# Altium PCB bottom_test_pcb.pcbdoc
Units mm, origin at the board's own origin, x right, y up, seen from the top; angles counter-clockwise.
Board outline 99.79 x 89.91 mm, 2 copper layers (Top Layer, Bottom Layer), stack 1.671 mm thick; 74 components, 41 nets, 281 pads, 5 vias.
Unrouted connection lines stored in the file: 2.
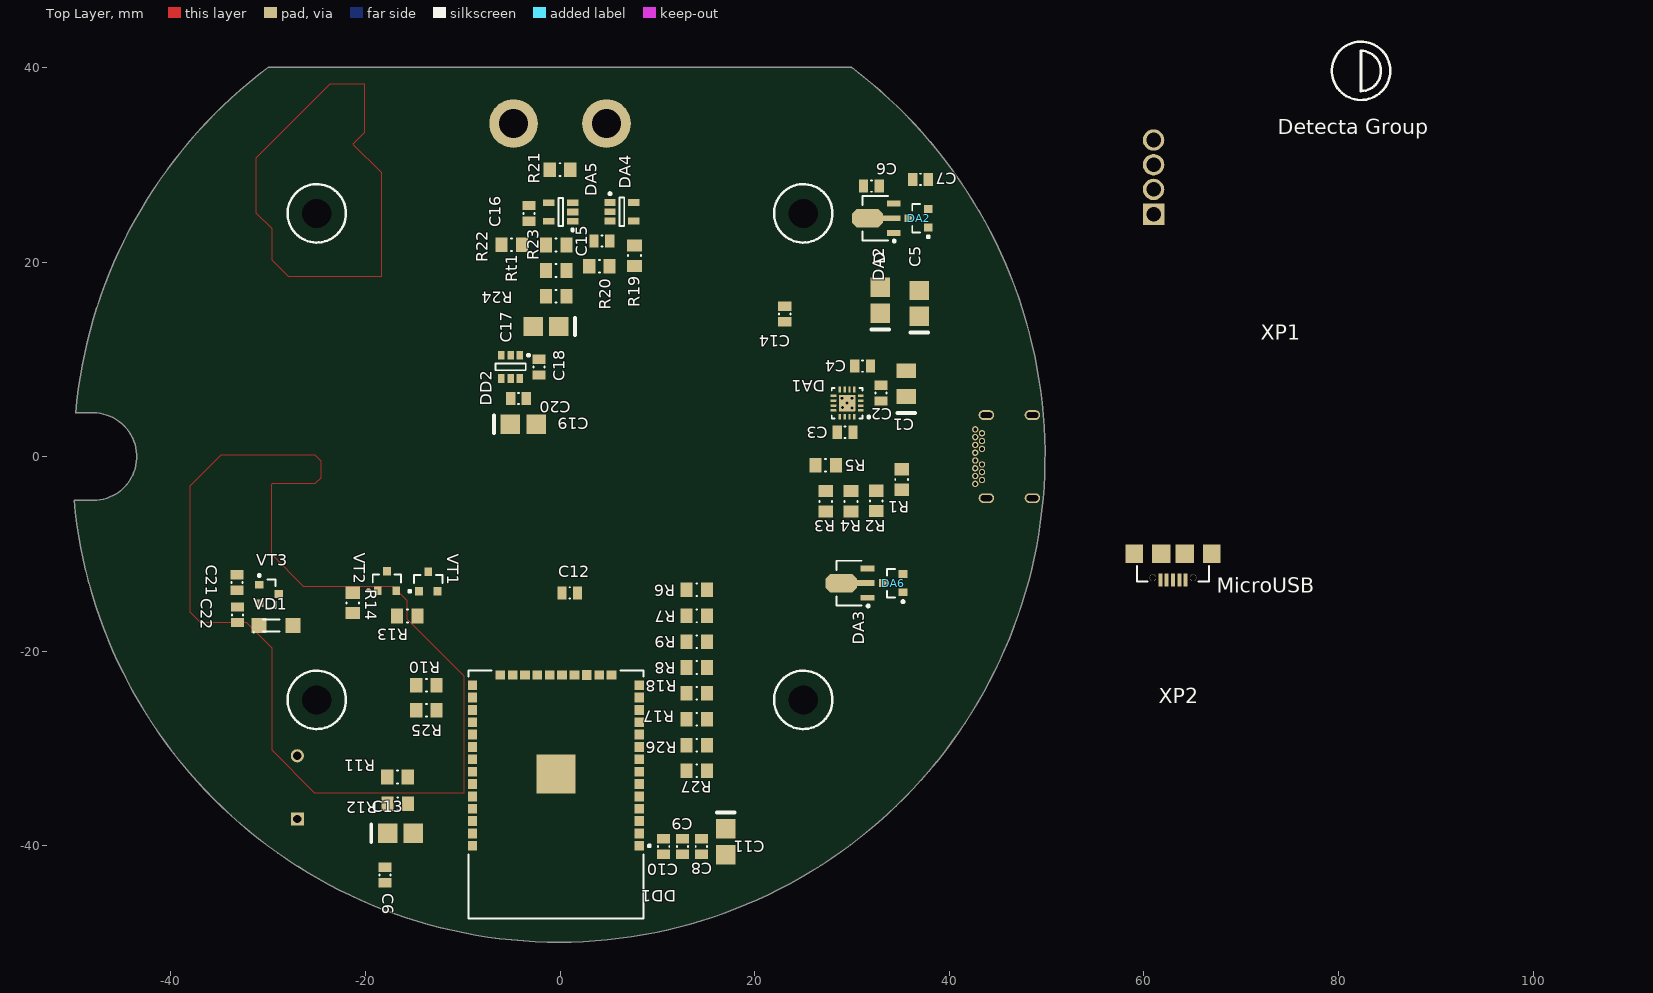
[diagram p0: Top Layer view]
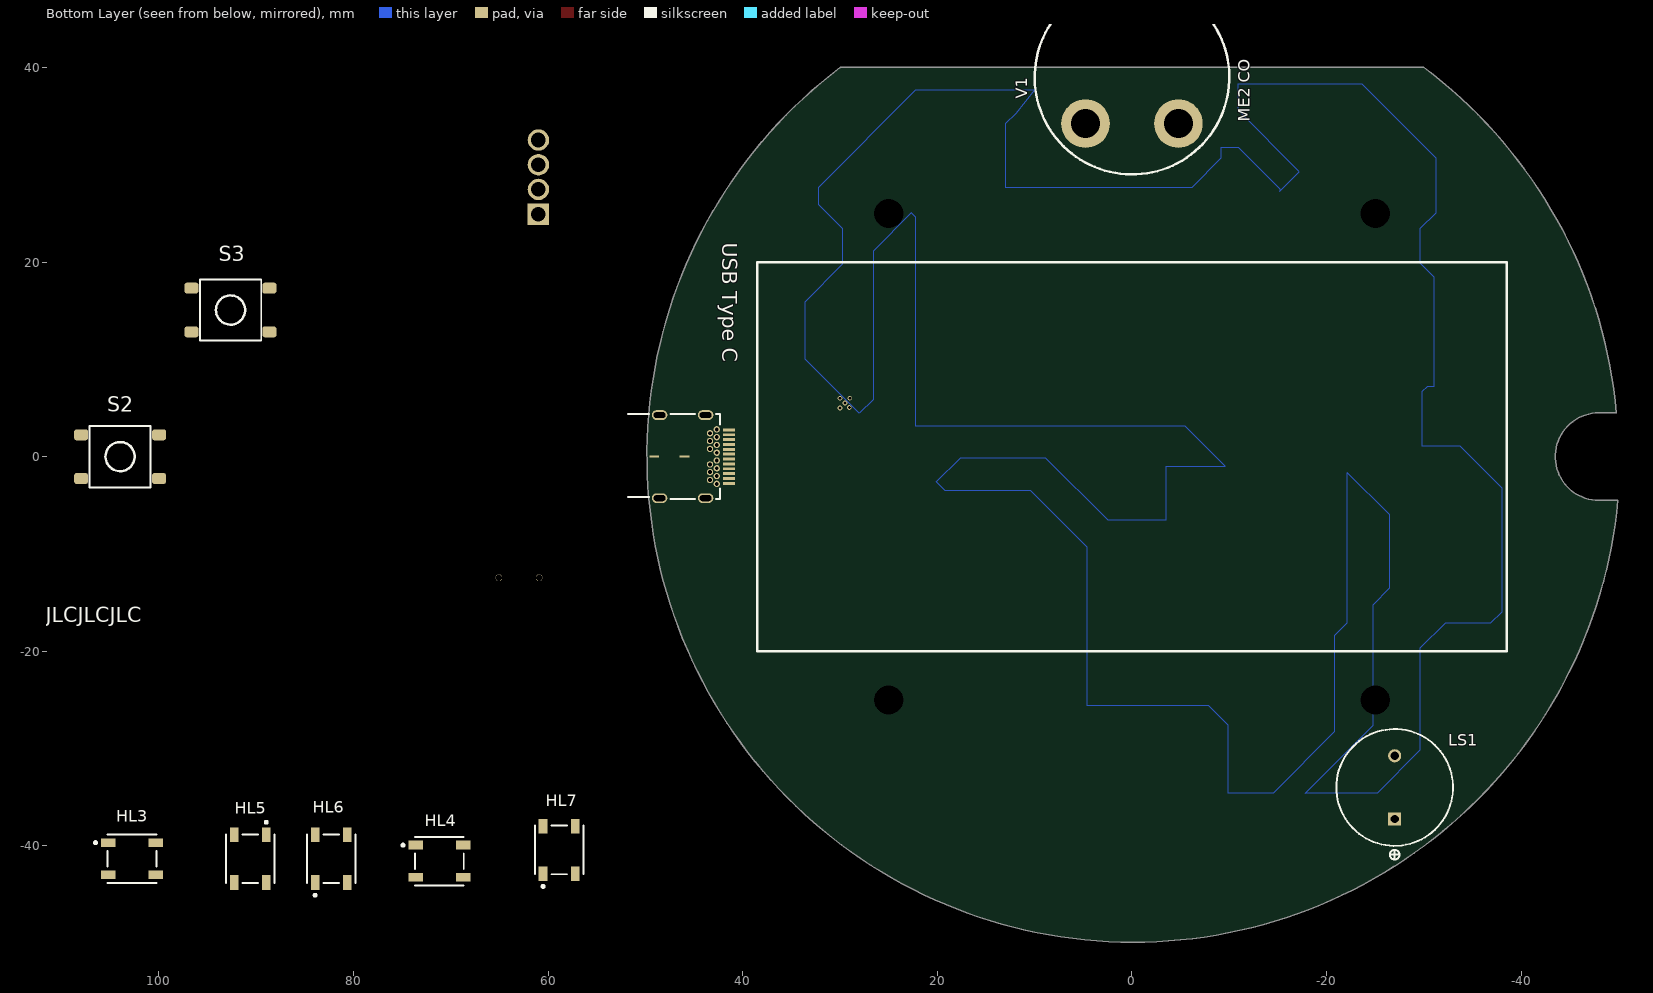
[diagram p1: Bottom Layer view, seen from below]

## Layer stack, top to bottom
Top Solder: solder mask 0.0102, Solder Resist, Dk 3.5
Top Layer: signal copper 0.0356
Dielectric 1: dielectric 1.6, FR-4, Dk 4.8
Bottom Layer: signal copper 0.0356
Bottom Solder: solder mask 0.0102, Solder Resist, Dk 3.5

## Board outline
-49.942,-4.496 ccw(c-0.153,0.09) 29.988,39.984 30,40 -30,40 ccw(c0,0) -49.797,4.496 -49.797,4.5 -48,4.5 cw(c-48,0) -48,-4.5

## Design rules (kind name [scope] priority, off if disabled: settings)
Clearance Polygons [InNet('GND')] p1: gap=0.4 ignorepadtopadclearanceinfootprint=FALSE
Clearance [All] p2: gap=0.254 ignorepadtopadclearanceinfootprint=FALSE
PolygonConnect [All] p1: connectstyle=Relief reliefconductorwidth=0.254 reliefentries=4 polygonreliefangle="90 Angle" airgapwidth=0.254
RoutingVias [All] p1: holewidth=0.711 width=1.27 viastyle="Through Hole" minholewidth=0.711 minwidth=1.27 maxholewidth=0.711 maxwidth=1.27
SolderMaskExpansion [All] p1: expansion=0.102
Width [All] p1: maxlimit=5 minlimit=0.2 preferedwidth=0.254
30 further rules are at their usual default settings.

## Classes and differential pairs
component class dAir: C1 C2 C4 C5 C6 C7 C8 C9 C10 C11 C12 C13 C14 C15 C16 C17 C18 C19 C20 C21 C22 DA1 DA2 DA3 DA4 DA5 DD1 DD2 HL3 HL7 LS1 R1 R2 R3 R4 R5 R6 R7 R8 R9 R10 R11 R12 R13 R14 R17 R18 R19 R20 R21 R22 R23 R24 R25 R26 R27 Rt1 V1 VD1 VT1 VT2 VT3

## Components (designator, comment, footprint, x,y, rotation, side; value= is the part's Value field where it differs from the comment)
C1 "47uF" KEMT-A-3216-18-2_M#1 35.6,7.5 r90 top
C2 "4.7uF" CAPC0805(2012)155_L 33,6.525 r90 top
C3 "1uF" CAPC0805(2012)155_L 29.3,2.5 r0 top value=4.7uF
C4 "4.7uF" CAPC0805(2012)155_L 31.1,9.3 r0 top
C5 "47uF" KEMT-A-3216-18-2_M#2 36.9,15.75 r90 top
C6 "1uF" CAPC0805(2012)155_L -18,-43 r270 top value=4.7uF
C6 "1uF" CAPC0805(2012)155_L 32,27.8 r0 top value=4.7uF
C7 "1uF" CAPC0805(2012)155_L 37.05,28.5 r180 top value=4.7uF
C8 "1uF" CAPC0805(2012)155_L 14.525,-40.075 r90 top value=4.7uF
C9 "1nF" CAPC0805(2012)155_L 12.6,-40.075 r90 top value=4.7uF
C10 "0.1uF" CAPC0805(2012)155_L 10.65,-40.065 r90 top value=4.7uF
C11 "100uF" KEMT-A-3216-18-2_M#2 17.025,-39.575 r270 top
C12 "0.1uF" CAPC0805(2012)155_L 1,-14 r0 top value=4.7uF
C13 "0.1uF" KEMT-A-3216-18-2_M#2 -16.405,-38.725 r0 top
C14 "0.1uF" CAPC0805(2012)155_L 23.1,14.65 r270 top value=4.7uF
C15 "0.1uF" CAPC0805(2012)155_L 4.3,22.15 r0 top value=4.7uF
C16 "1uF" CAPC0805(2012)155_L -3.2,25 r90 top value=4.7uF
C17 "47uF" KEMT-A-3216-18-2_M#2 -1.45,13.375 r180 top
C18 "0.1uF" CAPC0805(2012)155_L -2.15,9.2 r270 top value=4.7uF
C19 "10uF" KEMT-A-3216-18-2_M#2 -3.775,3.325 r0 top
C20 "0.1uF" CAPC0805(2012)155_L -4.275,5.975 r180 top value=4.7uF
C21 "100 nF" CAPC0805(2012)155_L -33.19,-12.935 r270 top value=4.7uF
C22 "1mF" CAPC0805(2012)155_L -33.14,-16.26 r90 top value=4.7uF
D "47uF" KEMT-A-3216-18-2_M#2 32.9,16.075 r90 top (schematic designator C5)
DA1 "BQ24075" RGT0016C_V 29.5,5.5 r180 top
DA2 "HT7530" SOT89_N 32.4,24.5 r180 top
DA2 "" ONSC-SOT-23-3-318-08_V 36.85,24.5 r180 top
DA3 "HT7530" SOT89_N 29.705,-13 r180 top
DA4 "AD8603AUJ-REEL" ADI-UJ-5_M 6.35,25.175 r0 top
DA5 "AD8603AUJ-REEL" ADI-UJ-5_M 0.075,25.15 r180 top
DA6 "" ONSC-SOT-23-3-318-08_V 34.255,-13 r180 top
DD1 "ESP-WROOM-32" OLMX-ESP-WROOM-32 -0.425,-31.22 r180 top
DD2 "MCP3421A2T-E/CH" SOT-23-CH6_L -5.075,9.225 r270 top
HL3 "WS2812B" ADAI-WS2812B_V 102.775,-41.325 r180 bottom
HL4 "WS2812B" ADAI-WS2812B_V 71.175,-41.575 r180 bottom
HL5 "WS2812B" ADAI-WS2812B_V 90.625,-41.325 r270 bottom
HL6 "WS2812B" ADAI-WS2812B_V 82.3,-41.325 r90 bottom
HL7 "WS2812B" ADAI-WS2812B_V 58.875,-40.425 r90 bottom
LS1 "KPI1410(temporally)" CZCY-CY-12085G-5042-2_V -27,-34 r90 bottom
MicroUSB "Comment" 629105136821 63,-10 r180 top
R1 "1k" RESC0805(2012)_M 35.1,-2.35 r270 top value="4.30 Ohm"
R2 "1k" RESC0805(2012)_M 32.5,-4.55 r270 top value="4.30 Ohm"
R3 "1k" RESC0805(2012)_M 27.3,-4.6 r270 top value="4.30 Ohm"
R4 "1k" RESC0805(2012)_M 29.9,-4.6 r270 top value="4.30 Ohm"
R5 "0" RESC0805(2012)_M 27.3,-0.9 r0 top value="4.30 Ohm"
R6 "1k" RESC0805(2012)_M 14.05,-13.675 r180 top value="4.30 Ohm"
R7 "1k" RESC0805(2012)_M 14.05,-16.375 r180 top value="4.30 Ohm"
R8 "470k" RESC0805(2012)_M 14.05,-21.675 r180 top value="4.30 Ohm"
R9 "100k" RESC0805(2012)_M 14.05,-19.025 r0 top value="4.30 Ohm"
R10 "470" RESC0805(2012)_M -13.73,-23.5 r0 top value="4.30 Ohm"
R11 "10k" RESC0805(2012)_M -16.705,-32.925 r0 top value="4.30 Ohm"
R12 "10k" RESC0805(2012)_M -16.68,-35.675 r0 top value="4.30 Ohm"
R13 "10k" RESC0805(2012)_M -15.69,-16.385 r180 top value="4.30 Ohm"
R14 "10k" RESC0805(2012)_M -21.29,-15.035 r270 top value="4.30 Ohm"
R17 "47k" RESC0805(2012)_M 14.05,-27 r0 top value="4.30 Ohm"
R18 "47k" RESC0805(2012)_M 14.05,-24.325 r0 top value="4.30 Ohm"
R19 "1M" RESC0805(2012)_M 7.65,20.65 r90 top value="4.30 Ohm"
R20 "150k" RESC0805(2012)_M 4.05,19.575 r0 top value="4.30 Ohm"
R21 "200" RESC0805(2012)_M 0,29.5 r180 top value="4.30 Ohm"
R22 "120k" RESC0805(2012)_M -4.975,21.775 r0 top value="4.30 Ohm"
R23 "100k" RESC0805(2012)_M -0.4,21.75 r0 top value="4.30 Ohm"
R24 "100" RESC0805(2012)_M -0.4,16.475 r180 top value="4.30 Ohm"
R25 "470" RESC0805(2012)_M -13.73,-26.075 r0 top value="4.30 Ohm"
R26 "47k" RESC0805(2012)_M 14.05,-29.675 r180 top value="4.30 Ohm"
R27 "47k" RESC0805(2012)_M 14.05,-32.3 r180 top value="4.30 Ohm"
Rt1 "47k" RESC0805(2012)_M -0.4,19.125 r0 top value="4.30 Ohm"
S2 "Comment" DIPT-DTSM-6_V 104,0 r180 bottom
S3 "Comment" DIPT-DTSM-6_V 92.65,15.065 r0 bottom
"USB Type C" "Comment" 632723300011 47.35,0 r270 bottom
V1 "ME2 CO" "ME2 CO" 0,39 r135 bottom
VD1 "LL4148" INF-SOD323_V -29.69,-17.36 r90 top
VT1 "bc847" ONSC-SOT-23-3-318-08_V -13.54,-12.835 r90 top
VT2 "bc847" ONSC-SOT-23-3-318-08_V -17.79,-12.785 r90 top
VT3 "" ONSC-SOT-23-3-318-08_V -29.915,-14.11 r0 top

## Footprints (in the part's own frame and the unit in brackets; to place one, negate y for a bottom-side part, rotate by r counter-clockwise, add the part's x,y. Pads: shape width x height; smd on the part's side, far side on the other; paste and mask are expansions set on the pad)
629105136821 [mm] "Micro USB 2.0 SMT Type B Horizontal 5 Contacts"
  rect 0.4x1.35 smd: 1(-1.3,2.675) 2(-0.65,2.675) 3(0,2.675) 4(0.65,2.675) 5(1.3,2.675)
  round 0.7 hole 0.7 unplated: MH1(-2.075,2.45) MH2(2.075,2.45)
  rect 1.8x1.9 smd: Shell(-4,0) Shell(4,0)
  rect 1.9x1.9 smd: Shell(-1.2,0) Shell(1.2,0)
  silkscreen extent -3.7,1.25 3.7,2.85, body extent -4,-2.73 4,3.17, height 2.69
632723300011 [mm] "USB 3.1 Type C Receptacle Horizontal THR"
  rect 0.3x1.2 smd: A1(-2.75,5.93) A2(-2.25,5.93) A3(-1.75,5.93) A4(-1.25,5.93) A5(-0.75,5.93) A6(-0.25,5.93) A7(0.25,5.93) A8(0.75,5.93) A9(1.25,5.93) A10(1.75,5.93) A11(2.25,5.93) A12(2.75,5.93)
  round 0.65 hole 0.4: B1(2.8,4.68) B2(2.4,3.98) B3(1.6,3.98) B4(1.2,4.68) B5(0.8,3.98) B6(0.4,4.68) B7(-0.4,4.68) B8(-0.8,3.98) B9(-1.2,4.68) B10(-1.6,3.98) B11(-2.4,3.98) B12(-2.8,4.68) G1(2,4.68) G2(-2,4.68)
  oval 1x1.6 hole 0.6 slot 1.2 at 90 deg: Shell(-4.27,-1.2) Shell(-4.27,3.53) Shell(4.27,-1.2) Shell(4.27,3.53)
  rect 0.2x1 smd: Shell(0,-1.75) Shell(0,1.35)
  silkscreen extent -4.37,-4.45 4.34,5, body extent -4.37,-5.6 4.37,6.19, height 3.05
ADAI-WS2812B_V [mm] "SMD, 4-Leads, Body 5x5mm, Pitch 3.3mm"
  rect 1.5x0.9 smd: 1(-2.45,1.65) 2(-2.45,-1.65) 3(2.45,-1.65) 4(2.45,1.65)
  silkscreen extent -3.88,-2.5 2.5,2.5, body extent -2.7,-2.5 2.7,2.5, height 1.69
ADI-UJ-5_M [mm] "SOT23, 5-Leads, Body 2.9x1.6mm, Pitch 0.95mm, IPC Low Density"
  rect 1.15x0.7 smd: 1(-1.225,0.95) 2(-1.225,0) 3(-1.225,-0.95) 4(1.225,-0.95) 5(1.225,0.95)
  silkscreen extent -1.35,-1.45 0.25,1.97, body extent -0.8,-1.45 0.8,1.45, height 1
CAPC0805(2012)155_L [mm] "Chip Capacitor, Body 2.0x1.2mm, Height 1.55mm, IPC High Density"
  rect 0.95x1.35 smd: 1(-0.8,0) 2(0.8,0)
  silkscreen extent -0.05,-0.57 0.05,0.57, body extent -1.1,-0.72 1.1,0.72, height 1.55
CZCY-CY-12085G-5042-2_V [mm] "Through-hole Buzzer, 2-Leads, Dia 12mm, Height 8.5mm"
  rect 1.35x1.35 hole 0.85: 1(-3.25,0)
  round 1.35 hole 0.85: 2(3.25,0)
  Mechanical 13 keep-out circle w0.1: c0,0 r6
  silkscreen extent -7.41,-6 6,6, body extent -6,-6 6,6, height 8.5
DIPT-DTSM-6_V [mm] "Switch, Through-Hole, 4 Leads, Body 8.5x8.5mm, Row Spacing 9.0mm, Pitch 4.5mm"
  rrect50% 1.448x1.143 smd: 1(4.01,-2.25) 2(-4,-2.25) 3(4.01,2.24) 4(-4,2.24)
  silkscreen extent -3.16,-3.16 3.15,3.15, body extent -4.5,-3.1 4.5,3.1, height 4.5
INF-SOD323_V [mm] "SOD, 2-Leads, Body 1.7x1.25 mm"
  rect 1.5x1.5 smd: 1(0,1.25) 2(0,-2.25)
  silkscreen extent -0.76,-0.85 0.6,1.83, body extent -0.63,-0.85 0.63,0.85, height 1.1
KEMT-A-3216-18-2_M#1 [mm] "Molded TAN Capacitor, 2-Leads, Body 3.4x1.8mm, IPC Low Density"
  rect 1.5x2 smd: 1(-1.325,0) 2(1.325,0)
  silkscreen extent -3,-0.9 -3,0.9, body extent -1.7,-0.9 1.7,0.9, height 1.8
KEMT-A-3216-18-2_M#2 [mm] "Molded TAN Capacitor, 2-Leads, Body 3.4x1.8mm, IPC Low Density"
  rect 2x2 smd: 1(-1.325,0) 2(1.325,0)
  silkscreen extent -3,-0.9 -3,0.9, body extent -1.7,-0.9 1.7,0.9, height 1.8
"ME2 CO" [mm]
  round 5 hole 3: 1(-6.75,0) 2(0,-6.75)
  silkscreen extent -10,-10 10,10
OLMX-ESP-WROOM-32 [mm] "SMD, 38-Leads, Body 18x25.5mm, Pitch 1.27mm"
  rect 0.95x1 smd: 1(-8.575,8.78) 2(-8.575,7.51) 3(-8.575,6.24) 4(-8.575,4.97) 5(-8.575,3.7) 6(-8.575,2.43) 7(-8.575,1.16) 8(-8.575,-0.11) 9(-8.575,-1.38) 10(-8.575,-2.65) 11(-8.575,-3.92) 12(-8.575,-5.19) 13(-8.575,-6.46) 14(-8.575,-7.73) 17(-3.175,-8.78) 25(8.575,-7.73) 26(8.575,-6.46) 27(8.575,-5.19) 28(8.575,-3.92) 29(8.575,-2.65) 30(8.575,-1.38) 31(8.575,-0.11) 32(8.575,1.16) 33(8.575,2.43) 34(8.575,3.7) 35(8.575,4.97) 36(8.575,6.24) 37(8.575,7.51) 38(8.575,8.78)
  rect 4x4 smd: 1(0,1.395)
  rect 1x0.95 smd: 15(-5.715,-8.78) 16(-4.445,-8.78) 18(-1.905,-8.78) 19(-0.635,-8.78) 20(0.635,-8.78) 21(1.905,-8.78) 22(3.175,-8.78) 23(4.445,-8.78) 24(5.715,-8.78)
  silkscreen extent -9.73,-9.23 9,16.27, body extent -9.04,-9.25 9.04,16.29, height 3.04
ONSC-SOT-23-3-318-08_V [mm] "SOT23, 3-Leads, Body 2.92x1.3mm, Pitch 0.95mm"
  rect 0.9x0.8 smd: 1(-1,0.95) 2(-1,-0.95) 3(1,0)
  silkscreen extent -1.13,-1.46 0.65,2.02, body extent -0.65,-1.46 0.65,1.46, height 1.11
RESC0805(2012)_M [mm] "Chip Resistor, Body 2.0x1.3mm, IPC Low Density"
  rect 1.25x1.5 smd: 1(-1.05,0) 2(1.05,0)
  silkscreen extent -0.05,-0.65 0.05,0.65, body extent -1.1,-0.67 1.1,0.67, height 0.7
RGT0016C_V [mm] "QFN, 16-Leads, Body 3x3mm, Pitch 0.5mm, Thermal Pad 1.65x1.65mm"
  rrect40% 0.6x0.25 smd: 1(-1.4,0.75) 2(-1.4,0.25) 3(-1.4,-0.25) 4(-1.4,-0.75) 9(1.4,-0.75) 10(1.4,-0.25) 11(1.4,0.25) 12(1.4,0.75)
  rrect40% 0.25x0.6 smd: 5(-0.75,-1.4) 6(-0.25,-1.4) 7(0.25,-1.4) 8(0.75,-1.4) 13(0.75,1.4) 14(0.25,1.4) 15(-0.25,1.4) 16(-0.75,1.4)
  rrect6% 1.7x1.7 smd paste-0.85: 17(0,0)
  rrect6% 1.55x1.55 on Top Paste: 17(0,0)
  silkscreen extent -2.35,-1.58 1.57,1.58, body extent -1.5,-1.5 1.5,1.5, height 1
SOT89_N [mm] "SOT89, 3-Leads, Body 4.5x2.4 mm, Pitch 1.5mm, Lead Span 4.1mm, IPC Medium Density"
  rect 1.4x0.6 smd: 1(-1.9,1.5) 3(-1.9,-1.5)
  rect 1.8x0.6 smd: 2(-1.7,0)
  oct 3.2x1.9 smd: 2(0.8,0)
  silkscreen extent -2.08,-2.3 1.3,2.47, body extent -1.3,-2.3 1.29,2.3, height 1.6
SOT-23-CH6_L [mm] "SOT23, 6-Leads, Body 2.9x1.7mm, Pitch 0.95mm, Lead Span 2.8mm, IPC High Density"
  rect 0.9x0.65 smd: 1(-1.2,0.95) 2(-1.2,0) 3(-1.2,-0.95) 4(1.2,-0.95) 5(1.2,0) 6(1.2,0.95)
  silkscreen extent -1.32,-1.55 0.35,1.95, body extent -0.9,-1.55 0.9,1.55, height 1.45

## Part data
C1 C5 C11 C13 C17 C19 D: library part CMP-2000-05172-1, Capacitance=10µF, ESR (Equivalent Series Resistance)=3.8Ohm, Lifetime @ Temp.=2000Hrs@85degC, Manufacturer=Kemet, Manufacturer Size Code=A, Operating Temperature=-55degC~125degC, Package / Case=1206(3216Metric), Package Description="2-Pin Surface Mount Device, Body 3.2 x 1.6 mm", Package Reference=1206, Standard Package=2,000, Tolerance=±10%, Voltage - Rated=10V, Catalog Drawings=T49x,T5xxSeries_A-side1T49x,T5xxSeries_A,B-side2T49x,T5xxSeries_A,SBottom, Category=Capacitors, Datasheet URL=http://www.farnell.com/datasheets/1824869.pdf, Datasheet Version=Apr-14, Family=TantalumCapacitors, Features=GeneralPurpose, Height - Seated (Max)="0.071\"(1.80mm)", Lead Spacing=-, Manufacturer URL=http://www.kemet.com/, Mounting Type=SurfaceMount, Online Catalog=T491Series, Other Names=399-3684-2, Packaging=Tape&Reel(TR), Product Training Modules=CapacitorBasics-TypicalUsesforCapacitorsDeratingGuidelinesforSurfaceMountTantalumCapacitors, Series=T491, Size / Dimension="0.126\"Lx0.063\"W(3.20mmx1.60mm)", Type=Molded
C2 C3 C4 C6 C6 C7 C8 C9 C10 C12 C14 C15 C16 C18 C20: library part CMP-1036-04882-1, "CAP 4.7uF 10V ±10% 0805 (2012 Metric) Thickness 1.55mm SMD", Case-EIA=0805, Case-Metric=2012, Rated Voltage="10 V", Tolerance=A±10%, Max Thickness="1.55 mm", Technology=SMT
C21 C22: library part CMP-1036-04882-1, "CAP 4.7uF 10V ±10% 0805 (2012  Thickness 1.55mm SMD", Case-EIA=0805, Case-Metric=2012, Rated Voltage="10 V", Tolerance=A±10%, Max Thickness="1.55 mm", Technology=SMT
DA1: library part CMP-0321-00238-2, "USB-Friendly Li-Ion Battery Charger and Power-Path Management IC, Vout 5.5 V, 4.3 V, -40 to 85 degC, 16-pin QFN (RGT), Green (RoHS & no Sb/Br)", Manufacturer="Texas Instruments", Over Voltage Protection=N, PartNumber=BQ24075RGTR, Code_JEDEC=MO-220, ComponentLink1Description=Datasheet, ComponentLink1URL=http://www.ti.com/general/docs/lit/getliterature.tsp?genericPartNumber=BQ24075&fileType=pdf, DatasheetVersion=SLUS810G, Eco-Plan="Green (RoHS & no Sb/Br)", Lead Acid=N, Li-Ion=N, Li-Polymer=N, Mounting Technology="Surface Mount", NiCd=N, NiMH=N, PackageDescription="16-Pin Plastic Quad Flat No-Lead, 3 x 3 mm Body, 0.5 mm Pitch, 1.7 x 1.7 mm Exposed Pad", PackageReference=RGT0016C, PackageVersion="revH, Oct-2011", SubFamily="Battery Charge Management", Vin(Min)(V)=4.3
DA2 DA3: library part CMP-0204-00106-1, "100mA Low Power LDO, Output Voltage 3.0V, SOT89 Pkg", Code_IPC=SOT89, DatasheetVersion="Rev1.80, Mar-2010", PackageDescription="3-Pin SOT-89 Package 1.5 mm Pitch, 4.1 mm Lead Span", PackageReference=SOT89, PackageVersion=May-2010
DA2 DA6 VT1 VT2 VT3: library part CMP-1048-00737-1, "General Purpose Transistor, NPN Silicon, 3-Pin SOT-23, Pb-Free, Tape and Reel", Manufacturer="On Semiconductor", PartNumber=BC817-25LT1G, ComponentLink1Description="Manufacturer URL", ComponentLink1URL=http://www.onsemi.com/, ComponentLink2Description=Datasheet, ComponentLink2URL=http://www.onsemi.com/pub_link/Collateral/BC817-16LT1-D.PDF, ComponentLink3Description="Package Specification", ComponentLink3URL=http://www.onsemi.cn/pub_link/Collateral/318-08.PDF, DatasheetVersion="Rev. 12", fT Min (MHz)=100, IC Continuous (A)=0.5, Mounting Technology="Surface Mount", PackageDescription="3-Pin Small Outline Transistor, Body 2.92 x 1.3 mm, Pitch 0.95 mm", PackageReference=SOT-23-3-318-08, PackageVersion="Rev. AP, 11/2009", Packing="Tape and Reel", Polarity=NPN, RoHS=TRUE
DA4 DA5: library part CMP-0384-02070-2, "Single Channel Single-Supply Operation Operational Amplifier, 400 KHz BW, 100 mV/us SR, Industrial, 5-pin SOT23 (UJ-5), Reel", Amplifiers Per Package=1, Generic Part Number=AD8603, Input Bias Current=200fA, Input Offset Voltage=12uV, Manufacturer="Analog Devices", Code_JEDEC=MO-193-AB, ComponentLink1Description="Manufacturer URL", ComponentLink1URL=http://www.analog.com/en/index.html, ComponentLink2Description=Datasheet, ComponentLink2URL=http://www.analog.com/static/imported-files/data_sheets/AD8603_8607_8609.pdf, ComponentLink3Description="Package Specification", ComponentLink3URL=http:/www.analog.com/static/imported-files/packages/PKG_PDF/TSOT(UJ)/UJ_5.pdf, ComponentLink4Description="Reference Circuit", ComponentLink4URL=http://www.analog.com/en/all-operational-amplifiers-op-amps/operational-amplifiers-op-amps/ad8603/products/product.html#product-recommendations, DatasheetVersion="Rev. C", Iq/Amp=50uA, Mounting Technology="Surface Mount", PackageDescription="5-Pin Thin Small Outline Transistor Package, Body 2.9 x 1.6 mm, Pitch 0.95 mm", PackageReference=UJ-5, PackageVersion=100708-A, PartNumber=AD8603AUJ-REEL, RevisionNote="Reference Circuit URL fixed", Slew Rate=100mV/us, Small Signal Bandwidth=400KHz, V Span Max=6V, V Span Min=1.8V
DD1: library part CMP-2000-07454-1, "Espressif System, 2.7 to 3.6 V, -40 to 85 degC, 38-Pin SMD", Manufacturer=Olimex, Package Description="38-Pin Surface Mount Device, Body 18 x 25.5 mm, Pitch 1.27 mm", Datasheet URL=http://www.espressif.com/sites/default/files/documentation/esp-wroom-32_datasheet_en.pdf, Datasheet Version="Rev. 2.1, 09/2017", Manufacturer URL=https://www.olimex.com, Mounting Technology=SurfaceMount, Package Reference=ESP-WROOM-32, RoHSCompliant=false
DD2: library part CMP-0188-00097-2, "18-Bit Analog-to-Digital Converter with I2C Interface and On-Board Reference, 6-Pin SOT-23, Extended Temperature, Tape and Reel", Code_IPC=SOT26A-6, ComponentLink1Description="Manufacturer URL", ComponentLink1URL=http://www.microchip.com/, ComponentLink2Description=Datasheet, ComponentLink2URL=http://ww1.microchip.com/downloads/en/DeviceDoc/22003e.pdf, ComponentLink3Description="Package Specification", ComponentLink3URL=http://www.microchip.com/stellent/groups/techpub_sg/documents/packagingspec/en012702.pdf, DatasheetVersion="revE, Aug-2009", PackageDescription="6-Lead Plastic Small Outline Transistor (CH) [SOT-23]", PackageReference=SOT-23-CH6, PackageVersion="revBB, Aug-2009", RevisionNote="URLs added."
HL3 HL4 HL5 HL6 HL7: library part CMP-1740-00005-1, "Intelligent Control LED Integrated Light Source, 3.5 to 5.3 V, -25 to 80 degC, 4-Pin SMD, RoHS, Bulk", Case\Package=Radial, Current Rating="240 mA", Max Operating Temperature="125 degC", Min Operating Temperature="-55 degC", Package Quantity=200, Tolerance=10%, ComponentLink1Description="Manufacturer URL", ComponentLink1URL=https://www.adafruit.com/, ComponentLink2Description=Datasheet, ComponentLink2URL=https://cdn-shop.adafruit.com/datasheets/WS2812B.pdf, DatasheetVersion=May-13, Height="12.2 mm", Lead Pitch="5 mm", Length="12.2 mm", Mount="Through Hole", PackageDescription="4-Pin Surface Mount Device, Body 5 x 5 mm, Pitch 3.3 mm", PackageReference=WS2812B, Packaging=Bulk, Pins=2, Radiation Hardening=No, REACH SVHC="No SVHC", RoHSCompliant=true, Shielding=Unshielded
LS1: library part CMP-1019-00001-1, "Buzzer, 5 V, 42 Ohm, -20 to 70 degC, 2-Pin THD, Dia 12 mm, Height 8.5 mm, RoHS, Tray", Current Consumption (Max.)="35 mA", Manufacturer="Changzhou Chaoyin", Operating Temperature Range="-20 to 70 degC", Oscillation Frequency="2.048 KHz", PartNumber=cy-12085G-5042, Rated Voltage="5 V", Resistance Value="42 +/- 4 Ohm", Mounting Technology="Through Hole", PackageDescription="2-Pin Through-hole Buzzer, Dia 12 mm, Height 8.5 mm", PackageReference=CY-12085G-5042, Packing=Tray, RoHS=TRUE, Sound Pressure Level (Min.)="85 dB"
R1 R2 R3 R4 R5 R6 R7 R8 R9 R10 R11 R12 R13 R14 R17 R18 R19 R20 R21 R22 R23 R24 R25 R26 R27 Rt1: library part CMP-1013-00017-1, Case-EIA=0805, Case-Metric=2012, Power="0.125 W", Tolerance="5 %", Technology=SMT
VD1: library part CMP-1182-00006-1, "Silicon Schottky Diode, SOD323, Reel, Green", Manufacturer=Infineon, PartNumber="BAT 54-03W E6327", ComponentLink1Description="Manufacturer URL", ComponentLink1URL=http://www.infineon.com/, ComponentLink2Description=Datasheet, ComponentLink2URL=http://www.infineon.com/dgdl/bat54series.pdf?folderId=db3a30431400ef68011425f1ca2505e3&fileId=db3a304314dca3890115190b74210ea6, ComponentLink3Description="Package Specification", ComponentLink3URL=http://www.infineon.com/dgdl/SOD323-Package_Overview.pdf?folderId=db3a30431936bc4b011952aab84f3bbe&fileId=db3a30431936bc4b011952beed653be3, Green=TRUE, Mounting Technology="Surface Mount", PackageDescription="2-Pin Small Outline Diode Package, 1.25 x 1.7 mm Body", PackageReference=SOD323, Packing=Reel, RevisionNote="Lost Devices pt2"

## Free pads (board coordinates)
  rect 2.2x2.2 hole 1.5: 1(61,24.92)
  round 2.2 hole 1.5: 2(61,27.46) 3(61,30) 4(61,32.54)
  round 0 hole 3: 9(-25,-25) 9(-25,25) 9(25,-25) 9(25,25)

## Via types
v1: diameter 0.5, hole 0.3, Top Layer to Bottom Layer, 5 vias

## Nets (pads, with @x,y where several pads share a name; then routed paths per layer and width w, separated by ;. In a path a pad name is that pad's centre, name@x,y a point inside that pad or via, vN(x,y) a via of type N, cw(c..) or ccw(c..) an arc to the next point about the centre after c; other vN are vias at no path point)
3V: C7.2 C14.2 C16.1 C19.1 C20.2 DA2.2@37.85,25.45 DA2.3@34.3,26 DA4.5 DA5.5 DD2.5 R19.2
5V: C3.1 D.1 DA1.13 MicroUSB.5 R1.1 R5.2
+E: C4.1 C5.1 C12.2 C22.1 DA1.5 DA1.10 DA1.11 HL3.1 HL4.1 HL5.1 HL6.1 HL7.1 LS1.1 R5.1 R6.1 R7.1 R9.2 VD1.1
GND: C1.2 C2.2 C3.2 C4.2 C5.2 C6.1 C7.1 C8.1 C9.1 C10.1 C11.2 C12.1 C13.2 C14.1 C15.1 C16.2 C18.2 C19.2 C20.1 C21.2 C22.2 D.2 DA1.4 DA1.6 DA1.8 DA1.14 DA1.15 DA1.17@29.5,5.5 DA2.1 DA3.1 DA4.2 DA5.2 DA6.1 DD1.1 DD1.15 DD1.38 DD2.2 DD2.6 HL3.3 HL4.3 HL5.3 HL6.3 HL7.3 R2.2 R3.2 R4.2 R8.1 R20.1 VT3.2
  other v1: 30,5 29.05,5.05 29.5,5.5 29,6 30,6
NetBAT1_1: C1.1 C2.1 DA1.2 DA1.3
NetC6_2: C6.2 DA2.2@31.6,24.5 DA2.2@34.1,24.5 DA2.3@35.85,24.5 DA3.2 DA6.3
NetC13_1: C13.1 DD1.3 R12.1 VT1.3
NetC15_2: C15.2 DA4.3 R19.1 R20.2
NetC17_1: C17.1 DA5.1 R23.2 R24.1 Rt1.2
NetC17_2: C17.2 DA5.4 R21.2 R22.1 V1.1
NetC18_1: C18.1 DD2.1 R24.2
NetC21_1: C21.1 R25.1 VT3.1
NetDA1_1: DA1.1 R1.2 R2.1
NetDA1_7: DA1.7 DD1.8 R26.2
NetDA1_9: DA1.9 DD1.6 R27.2
NetDA1_12: DA1.12 R3.1
NetDA1_16: DA1.16 R4.1
NetDA4_1: DA4.1 DA4.4 DA5.3 R21.1 V1.2
NetDD1_7: DD1.7 R8.2 R9.1
NetDD1_9: DD1.9 R17.1
NetDD1_12: DD1.12 R18.1 S2.1 S2.2
NetDD1_25: DD1.25 R11.1 VT2.3
NetDD1_26: DD1.26 R10.2
NetDD1_27: DD1.27 R25.2
NetDD1_33: DD1.33 DD2.4
NetDD1_34: DD1.34 pad.1
NetDD1_35: DD1.35 pad.2
NetDD1_36: DD1.36 DD2.3
NetHL1_1: R7.2
NetHL2_1: R6.2
NetHL3_2: HL3.2 HL7.4
NetHL3_4: HL3.4 R10.1
NetLS1_2: LS1.2 VD1.2 VT3.3
NetR13_1: R13.1 VT1.1
NetR13_2: pad.4 R13.2 VT2.2
NetR14_1: R14.1 VT2.1
NetR14_2: pad.3 R14.2 VT1.2
NetR15_2: 
NetR16_2: 
NetR22_2: R22.2 R23.1 Rt1.1
"V ESP": C8.2 C9.2 C10.2 C11.1 DA3.3 DA6.2 DD1.2 R11.2 R12.2 R17.2 R18.2 R26.1 R27.1
pads on no net: "USB Type C.A1" "USB Type C.A2" "USB Type C.A3" "USB Type C.A4" "USB Type C.A5" "USB Type C.A6" "USB Type C.A7" "USB Type C.A8" "USB Type C.A9" "USB Type C.A10" "USB Type C.A11" "USB Type C.A12" "USB Type C.B1" "USB Type C.B2" "USB Type C.B3" "USB Type C.B4" "USB Type C.B5" "USB Type C.B6" "USB Type C.B7" "USB Type C.B8" "USB Type C.B9" "USB Type C.B10" "USB Type C.B11" "USB Type C.B12" "USB Type C.G1" "USB Type C.G2" "USB Type C.Shell" DA1.17@29.5,5.5 DD1.4 DD1.5 DD1.10 DD1.11 DD1.13 DD1.14 DD1.16 DD1.17 DD1.18 DD1.19 DD1.20 DD1.21 DD1.22 DD1.23 DD1.24 DD1.28 DD1.29 DD1.30 DD1.31 DD1.32 DD1.37 HL4.2 HL4.4 HL5.2 HL5.4 HL6.2 HL6.4 HL7.2 MicroUSB.1 MicroUSB.2 MicroUSB.3 MicroUSB.4 MicroUSB.MH1 MicroUSB.MH2 MicroUSB.Shell S2.3 S2.4 S3.1 S3.2 S3.3 S3.4

## Polygon pours and split planes (outlines as drawn)
GND on Top Layer "NONET_L01_P004" (solid, remove dead copper, shelved, pour order 4): -15.745,-14.755 -15.745,-16.655 -9.9,-22.5 -9.9,-34.6 -25.2,-34.6 -29.6,-30.2 -29.6,-22.7 -29.6,-19.7 -32.2,-17.1 -36.9,-17.1 -38,-16 -38,-3 -34.8,0.2 -25.2,0.2 -24.6,-0.4 -24.6,-2.2 -25.2,-2.8 -29.6,-2.8 -29.7,-2.9 -29.7,-10 -26.4,-13.3 -17.2,-13.3
GND on Top Layer "GND_L01_P002" (solid, remove dead copper, shelved, pour order 2): -23.6,38.3 -20.1,38.3 -20.1,33.3 -21.287,32.113 -18.4,29.225 -18.4,18.5 -27.9,18.5 -29.6,20.2 -29.6,23.4 -31.2,25 -31.2,30.7
GND on Bottom Layer "GND_L02_P000" (solid, remove dead copper, shelved, pour order 0): -25.2,-34.6 -17.8,-34.6 -24.8,-27.6 -24.8,-15.2 -26.5,-13.5 -26.5,-6 -22.147,-1.647 -22.1,-1.694 -22.1,-17.123 -20.8,-18.423 -20.8,-28.3 -14.5,-34.6 -9.9,-34.6 -9.9,-27.588 -7.912,-25.6 4.6,-25.6 4.6,-19.7 4.6,-9.3 10.4,-3.5 19.2,-3.5 20.1,-2.6 17.594,-0.094 8.908,-0.094 2.502,-6.5 -3.5,-6.5 -3.5,-1.008 -9.534,-1.008 -9.565,-0.977 -5.488,3.1 22.2,3.1 22.2,24.577 22.662,25.038 26.6,21.1 26.6,5.865 28.033,4.433 33.6,10 33.6,15.9 29.7,19.8 29.7,23.4 32.2,25.9 32.2,27.7 22.2,37.7 10,37.7 11.95,35.25 13,34.2 13,27.7 -6.2,27.7 -9.2,30.7 -9.2,31.8 -10.9,31.8 -15.179,27.521 -15.179,27.279 -17.2,29.3 -10.9,35.6 -10.9,38.3 -23.6,38.3 -31.2,30.7 -31.2,25 -29.6,23.4 -29.6,19.9 -31,18.5 -31,7.206 -30.347,7.206 -29.807,6.666 -29.807,1.1 -31,1.1 -33.7,1.1 -38,-3.2 -38,-16 -36.8,-17.123 -32.177,-17.123 -29.6,-19.7 -29.6,-30.2

## Silkscreen, mask and mechanical layers (free items; w line width, h text height)
Top Overlay:
  circle w0.254: c-25,25 r3
  circle w0.254: c25,25 r3
  circle w0.254: c25,-25 r3
  circle w0.254: c-25,-25 r3
  circle w0.254: c82.325,39.65 r3
  lines w0.254: 82.3,37.566 ccw(c82.3,39.638) 82.3,41.709
  lines w0.3: 82.3,37.7 82.3,41.575
  text "Detecta Group" at 73.775,33.125 h1.52
  text "XP1" at 72,12 h1.52
  text "XP2" at 61.55,-25.325 h1.52
  text "dAir_board v 1.1.1" at 129,-29 h1.52
Bottom Overlay:
  lines w0.254: -38.5,-20 -38.5,20 38.5,20 38.5,-20 -38.5,-20
  text "JLCJLCJLCJLC" at 115,-17 h1.52
Mechanical 1:
  lines w1: -49.942,-4.5 -48,-4.5 ccw(c-48,0) -48,4.5 -49.797,4.5 ; -49.942,-4.496 ccw(c-0.153,0.09) 29.988,39.984 ; -49.797,4.496 cw(c0,0) -30,40 30,40

## Text inside footprints (layer, text, board x,y; h text height)
MicroUSB: Mechanical 2 "PCB Edge" at 64.2,-7.9 h0.41 r180
"USB Type C": Mechanical 2 "PCB Edge" at 52.95,1.7 h0.61 r90